# EAGLE board SX1231 (EAGLE 7.1.0)
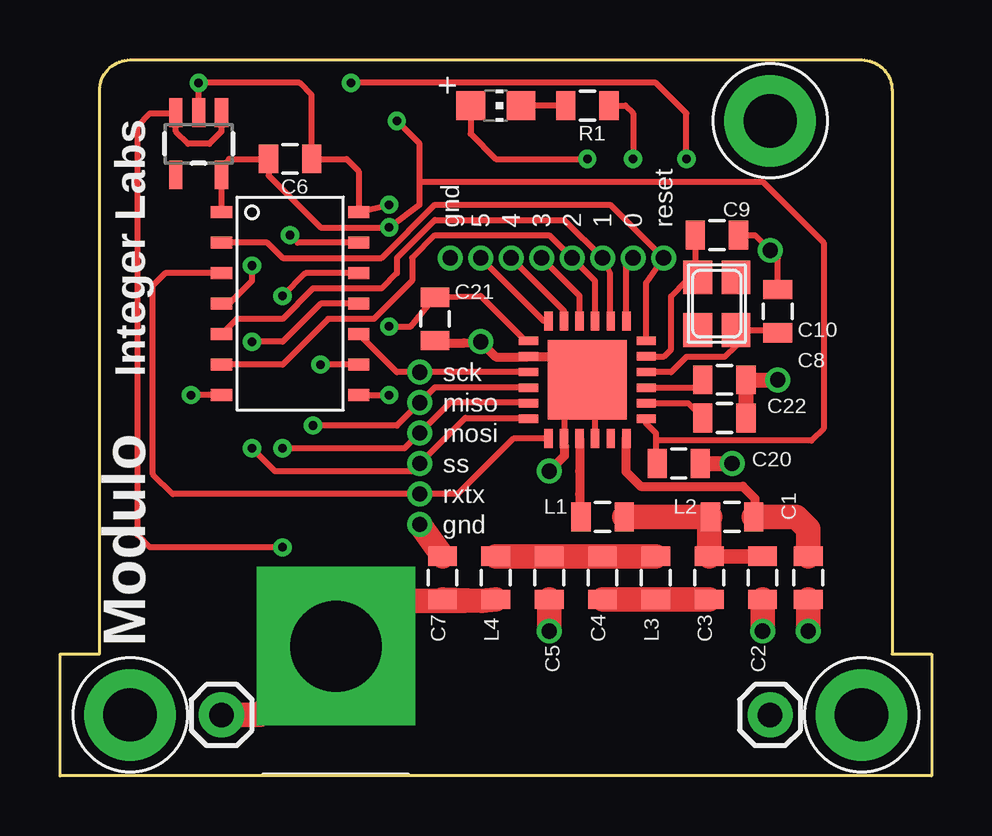
[diagram p0: board, top side]
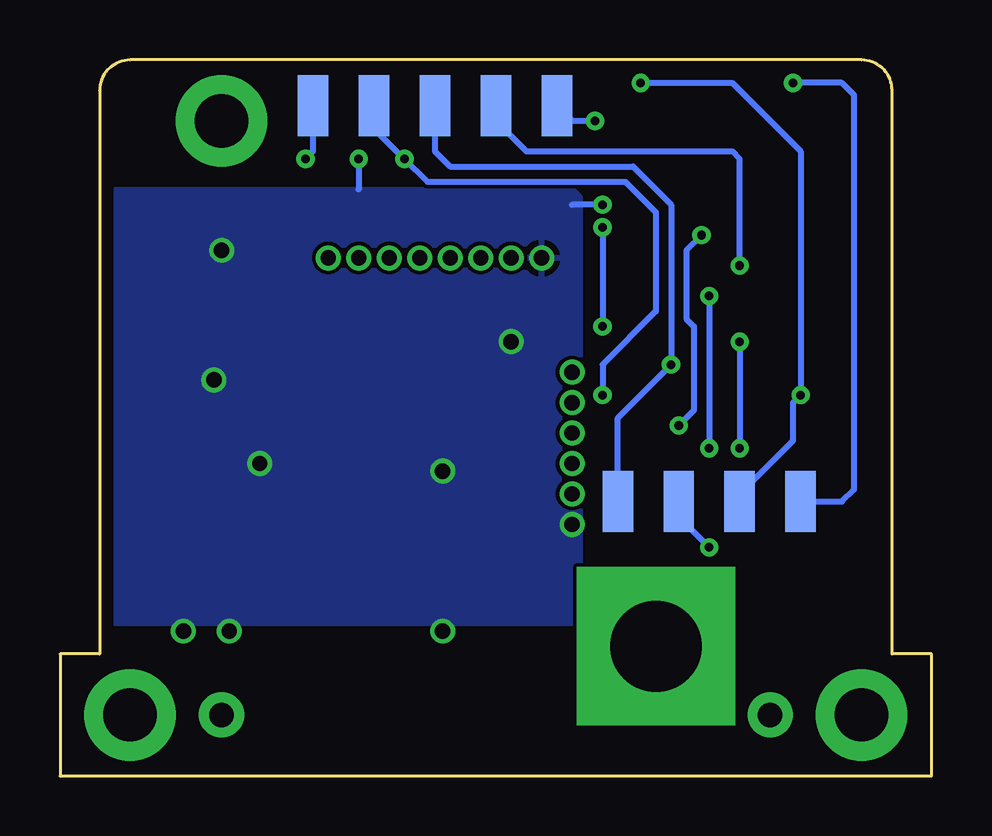
[diagram p1: board, bottom side, seen from below]

Size 36.32 x 29.84 mm. Coordinates in mm from the lower left corner, seen from the top.
Copper layers (1*16): Top 0.0178mm / dielectric 59mil / Bottom 0.0178mm
Design rules "SSC-EAGLE-2Lyr_v1.0.0.3": minimum track width 6mil, minimum drill 14mil, track to track 6mil, track to pad 6mil, pad to pad 6mil, via to via 6mil, smd to smd 6mil, copper to edge 20mil, drill to drill 16mil, minimum pad ring 8mil, minimum via ring 8mil, stop-mask expansion 3mil, vias tented up to drill 0mil, thermal gap 10mil

## Footprints (pad centres in the part's own frame; a part is rotated, then mirrored left to right if it is on the bottom)
0805 = smd 0.8 x 1.2: 1 -0.9,0; 2 0.9,0
1X01 = drill 1.016 pad 1.88: 1 0,0
CHIP-LED0805 = smd 1.2 x 1.2: A 0,-1.05; C 0,1.05
NX3225 = smd 1.4 x 1.2: 1 -1.1,-0.8; 2 1.1,-0.8; 3 1.1,0.8; 4 -1.1,0.8
SOT23-5 = smd 0.55 x 1.2: 1 -0.95,-1.3; 2 0,-1.3; 3 0.95,-1.3; 4 0.95,1.3; 5 -0.95,1.3
QFN-24 = smd 3.3 x 3.3: 0 0,0 | smd 0.8 x 0.35: 1 -2.45,1.625; 2 -2.45,0.975; 3 -2.45,0.325; 4 -2.45,-0.325; 5 -2.45,-0.975; 6 -2.45,-1.625; 13 2.45,-1.625; 14 2.45,-0.975; 15 2.45,-0.325; 16 2.45,0.325; 17 2.45,0.975; 18 2.45,1.625 | smd 0.35 x 0.8: 7 -1.625,-2.45; 8 -0.975,-2.45; 9 -0.325,-2.45; 10 0.325,-2.45; 11 0.975,-2.45; 12 1.625,-2.45; 19 1.625,2.45; 20 0.975,2.45; 21 0.325,2.45; 22 -0.325,2.45; 23 -0.975,2.45; 24 -1.625,2.45
FOOTPRINT2 = smd 1.27 x 2.54 bottom: BUS0 5.08,11.43; BUS1 7.62,11.43; BUS2 10.16,11.43; BUS3 12.7,11.43; PROG0 15.24,27.94; PROG1 17.78,27.94; PROG2 20.32,27.94; PROG3 22.86,27.94; PROG4 25.4,27.94 | drill 2.223 pad 3.81: P$1 2.54,2.54; P$2 33.02,2.54; P$3 29.21,27.305
SOIC14 = smd 0.508 x 0.889: 1 0,-3.175; 2 1.27,-3.175; 3 2.54,-3.175; 4 3.81,-3.175; 5 5.08,-3.175; 6 6.35,-3.175; 7 7.62,-3.175; 8 7.62,2.54; 9 6.35,2.54; 10 5.08,2.54; 11 3.81,2.54; 12 2.54,2.54; 13 1.27,2.54; 14 0,2.54
ANT-433-PW-LP = drill 3.81 pad 6.604 square: P$1 0,0
TESTPOINT = drill 0.635: P$1 0,0

## Placement (x,y rotation side)
C1  10nF  [0805]  31.18,8.26 270 top
C2  15pF  [0805]  29.27,8.26 270 top
C3  22pF  [0805]  27.05,8.26 270 top
C4  2.7pF  [0805]  22.61,8.26 90 top
C5  15pF  [0805]  20.38,8.26 90 top
C6  .47uF  [0805]  9.59,25.72 180 top
C7  8.2pF  [0805]  15.94,8.26 270 top
C8  .1uF  [0805]  27.69,16.51 0 top
C9  15pF  [0805]  27.37,22.54 0 top
C10  15pF  [0805]  29.91,19.37 90 top
C20  .1uF  [0805]  25.78,13.02 0 top
C21  .1uF  [0805]  15.62,19.05 270 top
C22  .1uF  [0805]  27.69,14.92 0 top
JP1  M01PTH  [1X01]  6.73,2.54 0 top
JP2  M01PTH  [1X01]  29.59,2.54 0 top
L1  10nH  [0805]  22.61,10.79 0 top
L2  33nH  [0805]  28,10.79 180 top
L3  12nH  [0805]  24.83,8.26 270 top
L4  10nH  [0805]  18.16,8.26 90 top
LED1  [CHIP-LED0805]  18.16,27.94 270 top
Q1  32Mhz  [NX3225]  27.37,19.68 270 top
R1  680  [0805]  21.97,27.94 180 top
U1  [SOT23-5]  5.78,26.35 180 top
U$1  SX1231  [QFN-24]  21.97,16.51 180 top
U$2  FOOTPRINTFOOTPRINT-2  [FOOTPRINT2]  0.38,0 0 top
U$3  TINY841  [SOIC14]  9.91,23.5 270 top
U$4  ANTENNA  [ANT-433-PW-LP]  11.49,5.4 180 top
U$5  TESTPOINT  [TESTPOINT]  23.88,21.59 0 top
U$6  TESTPOINT  [TESTPOINT]  22.61,21.59 0 top
U$7  TESTPOINT  [TESTPOINT]  21.34,21.59 0 top
U$8  TESTPOINT  [TESTPOINT]  20.07,21.59 0 top
U$9  TESTPOINT  [TESTPOINT]  18.8,21.59 0 top
U$10  TESTPOINT  [TESTPOINT]  17.53,21.59 0 top
U$11  TESTPOINT  [TESTPOINT]  25.15,21.59 0 top
U$12  TESTPOINT  [TESTPOINT]  16.26,21.59 0 top
U$13  TESTPOINT  [TESTPOINT]  14.99,15.56 0 top
U$14  TESTPOINT  [TESTPOINT]  14.99,14.29 0 top
U$15  TESTPOINT  [TESTPOINT]  14.99,13.02 0 top
U$16  TESTPOINT  [TESTPOINT]  14.99,16.83 0 top
U$17  TESTPOINT  [TESTPOINT]  14.99,11.75 0 top

## Library data of the parts
C1-C10 C20-C22 L1-L4 R1 U$1 U$3-U$17 = IntegerLabs
JP1 JP2 = SparkFun-Connectors
LED1 Q1 = adafruit
U1 = SparkFun-PowerIC; PROD_ID: VREG-00822
U$2 = IntegerLabs; BOARD: Radio; VERSION: v1

## Nets
+5V: U1.1 U1.3 U$2.BUS2
G1: Q1.4
G2: Q1.2
GND: C1.2 C2.2 C5.1 C6.1 C7.1 C8.2 C9.2 C10.2 C20.2 C21.2 C22.2 R1.1 U1.2 U$1.0 U$1.14 U$1.20 U$1.22 U$2.BUS0 U$3.14 U$12.P$1
MISO/LED: LED1.A U$2.PROG3 U$3.8
N$2: C8.1 U$1.3
N$3: C9.1 Q1.1 U$1.5
N$4: C10.1 Q1.3 U$1.4
N$5: LED1.C R1.2
N$7: C22.1 U$1.2
N$8: L1.1 U$1.21
N$9: C2.1 C3.1 L1.2 L2.2
N$10: C3.2 C4.1 L3.2
N$11: C4.2 C5.2 L3.1 L4.2
N$12: C7.2 JP1.1 L4.1 U$4.P$1
RESET: U$2.PROG1 U$3.4
SCL/SCK: U$2.BUS3 U$2.PROG2 U$3.9
SDA/MOSI: U$2.BUS1 U$2.PROG4 U$3.7
SX_DIO0: U$1.7 U$5.P$1
SX_DIO1: U$1.8 U$3.5 U$6.P$1
SX_DIO2: U$1.9 U$3.6 U$7.P$1
SX_DIO3: U$1.10 U$8.P$1
SX_DIO4: U$1.11 U$9.P$1
SX_DIO5: U$1.12 U$10.P$1
SX_MISO: U$1.16 U$3.13 U$13.P$1
SX_MOSI: U$1.17 U$3.12 U$14.P$1
SX_NSS: U$1.18 U$3.11 U$15.P$1
SX_RESET: U$1.6 U$3.2 U$11.P$1
SX_RXTX: U$1.19 U$3.3 U$17.P$1
SX_SCK: U$1.15 U$3.10 U$16.P$1
VCC: C6.2 C20.1 C21.1 U1.5 U$1.1 U$1.13 U$2.PROG0 U$3.1
VR_PA: C1.1 L2.1 U$1.24

## Tracks (layer width: path | path; a pad name or v marks a point on that pad's centre or on a via)
+5V  (via drill 0.36)
  Top 0.254: v9.27,9.53 3.75,9.53 3.24,10.03 3.24,27.11 3.75,27.62 4.54,27.62 U1.3 | 4.8,27.62 U1.3 | U1.1 6.73,26.86 6.22,26.35 5.33,26.35 4.83,26.86 U1.3
  Bottom 0.254: U$2.BUS2 10.54,10.79 v9.27,9.53
GND  (via drill 0.36, 0.64)
  Top 0.254: R1.1 23.56,27.94 23.88,27.62 v23.88,25.72 | 28.64,14.87 C22.2 | C21.2 15.67,18.05 | C10.2 29.91,21.59 v29.59,21.91 28.96,22.54 C9.2 | v13.72,23.81 U$3.14 12.45,25.21 11.94,25.72 C6.1 10.49,28.38 9.98,28.89 v5.78,28.89 U1.2 | U$1.22 22.3,14.91 21.97,15.24 21.34,15.24 21.02,14.92 21.02,14.08 U$1.20
  Top 0.381: 21,15.54 U$1.0 | 22.3,16.18 U$1.0 | U$1.0 21,17.48 20.72,17.48 20.7,17.46 19.54,17.46 U$1.14 19.5,17.46 18.16,17.46 v17.53,18.1 16.84,18.05 15.67,18.05 | U$1.20 21,13.95 21.02,13.65 21.02,13.34 v20.38,12.7
  Top 0.635: C22.2 C8.2 v29.91,16.51 | C20.2 v28,13.02
  Top 1.016: C7.1 v14.99,10.48 | C5.1 v20.38,6.03 | C2.2 v29.27,6.03 | C1.2 v31.18,6.03
  Bottom 0.254: v23.88,25.72 23.88,24.45 | U$2.BUS0 3.75,11.43 3.24,11.94 3.24,28.38 3.75,28.89 v5.78,28.89 | v13.72,23.81 14.99,23.81
  pour Bottom: 14.67,6.35 37.53,6.35 37.21,24.45 14.99,24.45 14.67,24.13
MISO/LED  (via drill 0.36)
  Top 0.254: U$3.8 v13.72,15.88 | LED1.A 17.11,26.77 18.16,25.72 v21.97,25.72
  Bottom 0.254: U$2.PROG3 23.24,26.99 v21.97,25.72 21.02,24.77 12.76,24.77 11.49,23.5 11.49,19.37 13.72,17.14 v13.72,15.88
N$2
  Top 0.254: U$1.3 26.46,16.18 C8.1
N$3
  Top 0.254: U$1.5 25.17,17.48 25.46,17.78 25.46,20 26.1,20.64 Q1.1 26.47,21.2 C9.1
N$4
  Top 0.254: U$1.4 24.43,16.83 25.46,16.83 26.1,17.46 27.69,17.46 28.17,17.95 Q1.3 29.5,18.59 C10.1
N$5
  Top 0.254: R1.2 LED1.C
N$7
  Top 0.254: U$1.2 26.17,15.54 C22.1
N$8
  Top 0.381: U$1.21 21.65,12.69 21.65,11.75 21.65,10.85 L1.1
N$9
  Top 0.61: C3.1 C2.1
  Top 1.016: L1.2 L2.2 27.05,10.79 C3.1
N$10
  Top 1.016: C3.2 L3.2 C4.1
N$11
  Top 1.016: L4.2 C5.2 C4.2 L3.1
N$12
  Top 1.016: JP1.1 8.32,2.54 10.86,5.08 U$4.P$1 11.44,5.45 13.45,7.36 14.35,7.3 16.84,7.3 C7.2 17.58,7.3 L4.1
RESET  (via drill 0.36)
  Top 0.254: U$3.4 7.05,19.68 8,20.64 v8,21.27
  Bottom 0.254: U$2.PROG1 18.16,27.3 16.89,26.04 8.32,26.04 8,25.72 v8,21.27
SCL/SCK  (via drill 0.36)
  Top 0.254: U$3.9 v10.86,17.14
  Bottom 0.254: U$2.PROG2 20.7,26.04 20.07,25.4 12.45,25.4 10.86,23.81 v10.86,17.14 13.08,14.92 U$2.BUS3
SDA/MOSI  (via drill 0.36)
  Top 0.254: U$3.7 v5.46,15.88 | v26.1,25.72 26.1,27.62 24.83,28.89 v12.13,28.89
  Bottom 0.254: U$2.PROG4 25.78,26.04 v26.1,25.72 | U$2.BUS1 8,11.75 5.78,13.97 5.78,15.56 v5.46,15.88 5.46,26.04 8.32,28.89 v12.13,28.89
SX_DIO0
  Top 0.254: U$1.7 23.6,21.23 U$5.P$1
SX_DIO1
  Top 0.254: U$3.5 7.37,19.05 9.27,19.05 10.54,20.32 13.4,20.32 14.03,20.96 14.03,21.59 15.62,23.18 21.02,23.18 U$6.P$1 22.92,20.96 22.92,19.05 U$1.8
SX_DIO2
  Top 0.254: U$3.6 9.27,17.14 11.18,19.05 13.08,19.05 14.67,20.64 14.67,21.59 15.62,22.54 20.38,22.54 U$7.P$1 22.3,20.63 U$1.9
SX_DIO3
  Top 0.254: U$1.10 21.65,20.01 U$8.P$1
SX_DIO4
  Top 0.254: U$1.11 21,19.39 U$9.P$1
SX_DIO5
  Top 0.254: 20.38,18.73 U$1.12 20.16,18.96 U$10.P$1
SX_MISO  (via drill 0.36)
  Top 0.254: U$3.13 9.91,22.23 v9.59,22.54 | U$1.16 15.62,16.19 U$13.P$1 14.03,14.61 v10.54,14.61
  Bottom 0.254: v9.59,22.54 10.22,21.91 10.22,19.05 9.91,18.73 9.91,15.24 v10.54,14.61
SX_MOSI  (via drill 0.36)
  Top 0.254: U$3.12 10.22,20.96 v9.27,20 | U$1.17 19.5,15.56 16.26,15.56 U$14.P$1 14.35,13.65 v9.27,13.65
  Bottom 0.254: v9.27,20 v9.27,13.65
SX_NSS  (via drill 0.36)
  Top 0.254: U$3.11 10.86,19.68 9.27,18.1 v8,18.1 | v8,13.65 8.95,12.7 14.67,12.7 U$15.P$1 16.89,14.92 19.48,14.92 U$1.18
  Bottom 0.254: v8,18.1 v8,13.65
SX_RESET
  Top 0.254: U$1.6 24.42,20.55 U$11.P$1 22.92,23.81 15.62,23.81 13.4,21.59 9.27,21.59 8.64,22.23 U$3.2
SX_RXTX
  Top 0.254: U$3.3 4.38,20.96 3.87,20.45 3.87,12.57 4.7,11.75 U$17.P$1 16.57,11.75 18.89,14.06 U$1.19
SX_SCK
  Top 0.254: U$1.15 19.43,16.83 U$16.P$1 14.03,16.83 U$3.10
VCC  (via drill 0.36)
  Top 0.254: 14.99,24.77 14.99,23.81 v13.72,22.86 10.86,22.86 8.69,25.03 C6.2 7.05,25.72 6.73,25.37 | 14.99,24.77 14.99,26.35 v14.03,27.3 | U$1.1 24.42,14.7 24.83,14.29 24.83,13.97 | 24.83,13.97 24.83,13.07 C20.1 | 24.83,13.97 31.3,13.97 31.81,14.48 31.81,22.23 29.27,24.77 14.99,24.77 | v13.72,18.73 14.62,18.73 C21.1 17.53,20 19.43,18.1 U$1.13 | U$3.1 6.73,25.37 | 6.73,25.37 U1.5
  Bottom 0.254: U$2.PROG0 14.99,27.3 v14.03,27.3 | v13.72,22.86 v13.72,18.73
VR_PA
  Top 0.381: L2.1 28.96,10.85 28.96,11.56 28.45,12.07 24.19,12.07 23.59,12.67 U$1.24
  Top 1.016: C1.1 31.18,10.29 30.67,10.79 L2.1

## Text on the board
tPlace: gnd | 5 | 4 | 3 | 2 | 1 | 0 | reset | sck | miso | mosi | ss | rxtx | gnd